# Altium PCB PCB1.PcbDoc
Units mil, origin at the board's own origin, x right, y up, seen from the top; angles counter-clockwise.
Board outline 6000 x 4000 mil, 2 copper layers (Top Layer, Bottom Layer); 32 components, 38 nets, 186 pads, 10 vias.
Unrouted connection lines stored in the file: 58.
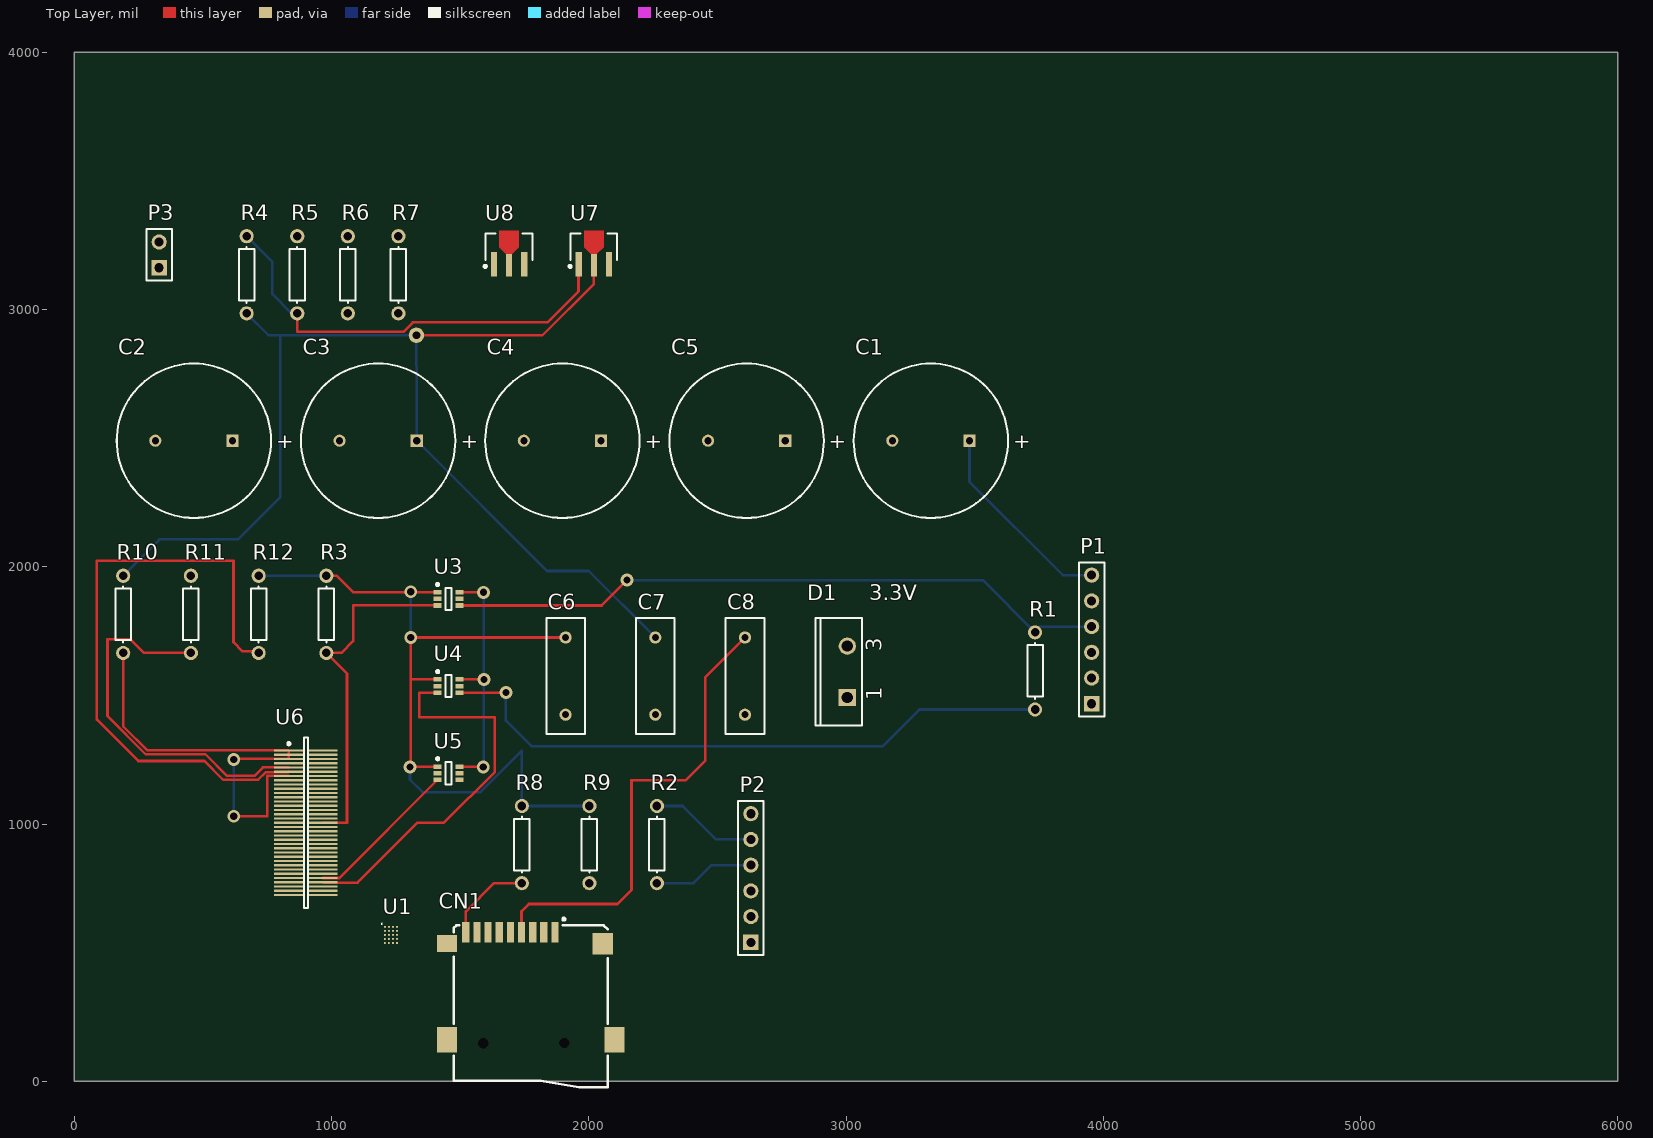
[diagram p0: Top Layer view]
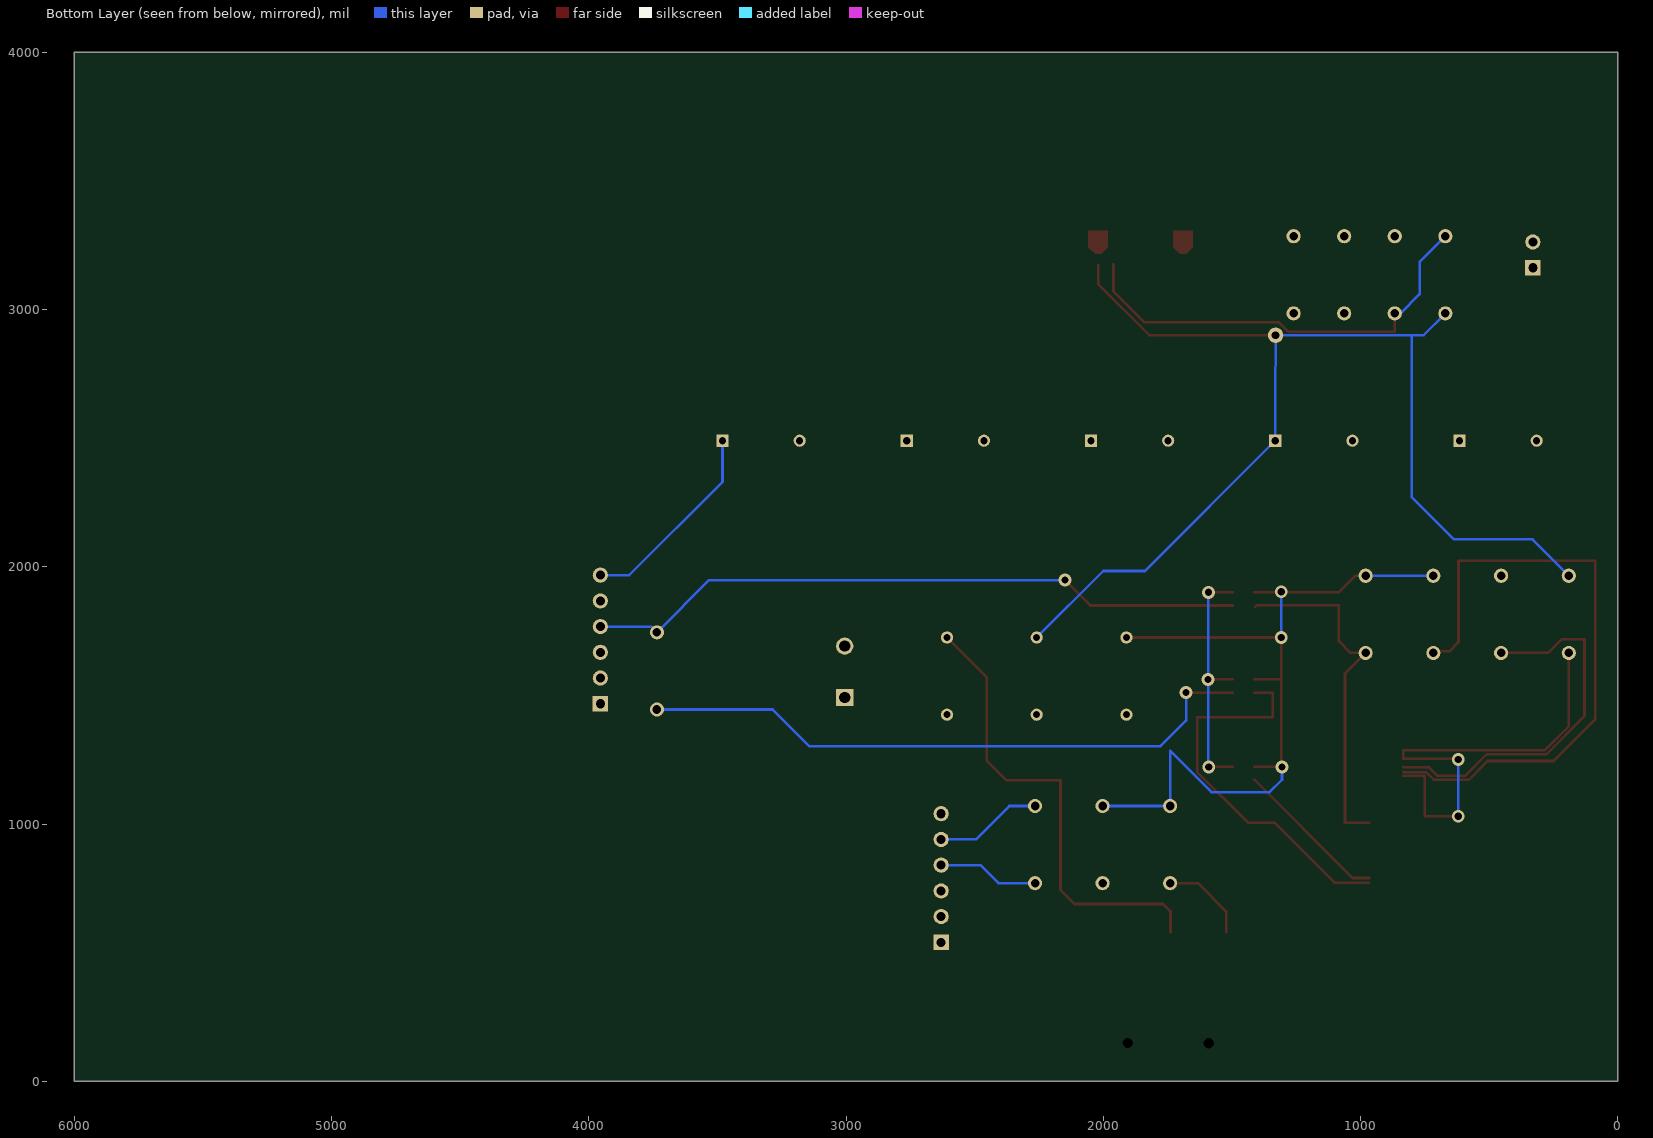
[diagram p1: Bottom Layer view, seen from below]

## Layer stack, top to bottom
Top Solder: solder mask 0.4, Solder Resist, Dk 3.5
Top Layer: signal copper 1.4
Dielectric 1: dielectric 12.6, FR-4, Dk 4.8
Bottom Layer: signal copper 1.4
Bottom Solder: solder mask 0.4, Solder Resist, Dk 3.5

## Board outline
0,0 6000,0 6000,4000 0,4000

## Design rules (kind name [scope] priority, off if disabled: settings)
Clearance Clearance_2 [InComponent('U7','U8')] p1: gap=0.1
Clearance Clearance_1 [All] p2: gap=5
Clearance [All] p3: gap=10
HoleToHoleClearance HoleToHoleClearance_5mil [All] p1: gap=5 allowstackedmicrovias=TRUE
HoleToHoleClearance [All] p2 off: gap=10 allowstackedmicrovias=TRUE
MinimumSolderMaskSliver [All] p1: minsoldermaskwidth=5
PolygonConnect [All] p1: connectstyle=Relief reliefconductorwidth=10 reliefentries=4 polygonreliefangle="90 Angle" airgapwidth=10
RoutingVias [All] p1: holewidth=28 width=50 viastyle="Through Hole" minholewidth=28 minwidth=50 maxholewidth=28 maxwidth=50
SolderMaskExpansion [All] p1: expansion=4
Width [All] p1: maxlimit=10 minlimit=10 preferedwidth=10
28 further rules are at their usual default settings.

## Components (designator, comment, footprint, x,y, rotation, side; value= is the part's Value field where it differs from the comment)
C1 "Cap Pol1" RB7.6-15 3330,2490 r0 top
C2 "Cap Pol1" RB7.6-15 465,2490 r0 top
C3 "Cap Pol1" RB7.6-15 1181.25,2490 r0 top
C4 "Cap Pol1" RB7.6-15 1897.5,2490 r0 top
C5 "Cap Pol1" RB7.6-15 2613.75,2490 r0 top
C6 "Cap" RAD-0.3 1910,1575 r90 top
C7 "Cap" RAD-0.3 2258.66,1575 r90 top
C8 "Cap" RAD-0.3 2607.32,1575 r90 top
CN1 "MicroSD Slot" "MICROSD Slot" 1615,585 r90 top
"D1     3.3V" "1N5257B" TO-220AC 3005,1591.34 r90 top
P1 "LiDAR" HDR1X6 3955,1467.38 r90 top
P2 "GPS" HDR1X6 2630,540 r90 top
P3 "8V Battery" HDR1X2 330,3162.62 r90 top
R1 "Res1" AXIAL-0.3 3735,1595 r90 top
R2 "Res1" AXIAL-0.3 2265,920 r270 top
R3 "Res1" AXIAL-0.3 980,1815 r90 top
R4 "Res1" AXIAL-0.3 670,3135 r90 top
R5 "Res1" AXIAL-0.3 866.67,3135 r90 top
R6 "Res1" AXIAL-0.3 1063.33,3135 r90 top
R7 "Res1" AXIAL-0.3 1260,3135 r90 top
R8 "Res1" AXIAL-0.3 1740,920 r90 top
R9 "Res1" AXIAL-0.3 2002.5,920 r90 top
R10 "Res1" AXIAL-0.3 190,1815 r270 top
R11 "Res1" AXIAL-0.3 453.33,1815 r90 top
R12 "Res1" AXIAL-0.3 716.67,1815 r90 top
U1 "SD Transceiver" TXS0206-29 1231,569 r0 top
U3 "Level Shifter" 74LVC1T45 1455,1875 r0 top
U4 "Level Shifter" 74LVC1T45 1455,1536.31 r0 top
U5 "Level Shifter" 74LVC1T45 1455,1197.62 r0 top
U6 "DF40(3)_70Pin" DF40(3)_70Pin 900,1005 r0 top
U7 "Power Regulator" LM317LCPK 2020,3217.15 r90 top
U8 "Power Regulator" LM317LCPK 1690,3217.15 r90 top

## Footprints (in the part's own frame and the unit in brackets; to place one, negate y for a bottom-side part, rotate by r counter-clockwise, add the part's x,y. Pads: shape width x height; smd on the part's side, far side on the other; paste and mask are expansions set on the pad)
74LVC1T45 [mm] "SOT65P210X110-6N, SOT23, 6-Leads, Body 2.00x2.10mm, Pitch 0.65mm, IPC Medium Density"
  rect 0.8x0.45 smd: 1(-1.075,0.65) 2(-1.075,0) 3(-1.075,-0.65) 4(1.075,-0.65) 5(1.075,0) 6(1.075,0.65)
  silkscreen extent -1.2,-1.1 0.3,1.55, body extent -0.67,-1.1 0.67,1.1, height 1.1
AXIAL-0.3 [mm] "Axial Device, Thru-Hole; 2 Leads; 0.3 in Pin Spacing"
  round 1.4 hole 0.85: 1(-3.81,0) 2(3.81,0)
  silkscreen extent -2.77,-0.76 2.77,0.76
DF40(3)_70Pin [mm] "SOJ42P450X305-70M,SOJ, 70-Leads, Body 16.80x4.53mm, Pitch 0.42mm, IPC Low Density"
  rect 2.91x0.22 smd: 1(1.675,7.14) 2(-1.675,7.14) 3(1.675,6.72) 4(-1.675,6.72) 5(1.675,6.3) 6(-1.675,6.3) 7(1.675,5.88) 8(-1.675,5.88) 9(1.675,5.46) 10(-1.675,5.46) 11(1.675,5.04) 12(-1.675,5.04) 13(1.675,4.62) 14(-1.675,4.62) 15(1.675,4.2) 16(-1.675,4.2) 17(1.675,3.78) 18(-1.675,3.78) 19(1.675,3.36) 20(-1.675,3.36) 21(1.675,2.94) 22(-1.675,2.94) 23(1.675,2.52) 24(-1.675,2.52) 25(1.675,2.1) 26(-1.675,2.1) 27(1.675,1.68) 28(-1.675,1.68) 29(1.675,1.26) 30(-1.675,1.26) 31(1.675,0.84) 32(-1.675,0.84) 33(1.675,0.42) 34(-1.675,0.42) 35(1.675,0) 36(-1.675,0) 37(1.675,-0.42) 38(-1.675,-0.42) 39(1.675,-0.84) 40(-1.675,-0.84) 41(1.675,-1.26) 42(-1.675,-1.26) 43(1.675,-1.68) 44(-1.675,-1.68) 45(1.675,-2.1) 46(-1.675,-2.1) 47(1.675,-2.52) 48(-1.675,-2.52) 49(1.675,-2.94) 50(-1.675,-2.94) 51(1.675,-3.36) 52(-1.675,-3.36) 53(1.675,-3.78) 54(-1.675,-3.78) 55(1.675,-4.2) 56(-1.675,-4.2) 57(1.675,-4.62) 58(-1.675,-4.62) 59(1.675,-5.04) 60(-1.675,-5.04) 61(1.675,-5.46) 62(-1.675,-5.46) 63(1.675,-5.88) 64(-1.675,-5.88) 65(1.675,-6.3) 66(-1.675,-6.3) 67(1.675,-6.72) 68(-1.675,-6.72) 69(1.675,-7.14) 70(-1.675,-7.14)
  silkscreen extent -1.8,-8.4 0.2,8.4, body extent -1.19,-8.4 1.19,8.4, height 3.05
HDR1X2 [mm] "Connector; Header; 2 Position"
  rect 1.5x1.5 hole 0.9: 1(0,0)
  round 1.5 hole 0.9: 2(2.54,0)
  silkscreen extent -1.27,-1.27 3.81,1.27
HDR1X6 [mm] "Connector; Header; 6 Position"
  rect 1.5x1.5 hole 0.9: 1(0,0)
  round 1.5 hole 0.9: 2(2.54,0) 3(5.08,0) 4(7.62,0) 5(10.16,0) 6(12.7,0)
  silkscreen extent -1.27,-1.27 13.97,1.27
LM317LCPK [mm] "SOT89-150P350X160-3N, SOT89, 3-Leads, Body 4.50x2.50mm, Pitch 1.50mm, Lead Span 3.5mm, IPC Medium Density"
  rect 2.4x0.6 smd: 1(-1.05,1.5) 3(-1.05,-1.5)
  rect 2.25x0.6 smd: 2(-1.15,0)
  Top Layer region: 0,0.3 0.65,0.95 1.6,0.95 2.159,0.95 2.286,0.95 2.286,0.762 2.286,0.508 2.286,0.067 2.286,-0.264 2.286,-0.95 1.6,-0.95 0.65,-0.95 0,-0.3 0,-0.025
  silkscreen extent -1.37,-2.3 2,2.47, body extent -0.6,-2.3 2,2.3, height 1.6
"MICROSD Slot" [mil] "MicroSD Card Socket"
  rect 80x28 smd: 1(-6,-253.47) 2(-6,-210.16) 3(-6,-166.85) 4(-6,-123.55) 5(-6,-80.24) 6(-6,-36.93) 7(-6,6.38) 8(-6,49.68) 9(-6,92.99)
  rect 98.43x78.74 smd: 10(-424.01,-485) 13(-424.01,166)
  rect 83x78.74 smd: 11(-50,-439.8)
  rect 67x78.74 smd: 12(-50,166)
  round 23.62 hole 40 unplated: MH1(-436.89,25) MH2(-436,-289.96)
  silkscreen extent -609,-459 50,140, body extent -611,-460 21,140, height 67
RAD-0.3 [mm] "Radial Cap, Thru-Hole; 2 Leads; 0.3 in Pin Spacing"
  round 1.2 hole 0.7: 1(-3.81,0) 2(3.81,0)
  silkscreen extent -5.71,-1.91 5.71,1.91
RB7.6-15 [mm] "Polarized Capacitor (Radial); 2 Leads"
  rect 1.2x1.2 hole 0.7: 1(3.81,0)
  round 1.2 hole 0.7: 2(-3.81,0)
  silkscreen extent -7.62,-7.62 7.62,7.62
TO-220AC [mm] "TO, Thru-Hole, Vertical, Heatsink Mounted; 3 In-Line Leads (1 Absent); Pitch 2.54 mm"
  rect 1.7x1.7 hole 1.1: 1(-2.54,0)
  round 1.7 hole 1.1: 3(2.54,0)
  silkscreen extent -5.3,-1.45 5.3,3.15
TXS0206-29 [mm] "BGA20C40P4X5_156X196X50, BGA, 20-Leads, Body 1.56x1.96mmx0.50mm, Pitch 0.40mm"
  round 0.2 smd: A1(-0.6,0.8) A2(-0.2,0.8) A3(0.2,0.8) A4(0.6,0.8) B1(-0.6,0.4) B2(-0.2,0.4) B3(0.2,0.4) B4(0.6,0.4) C1(-0.6,0) C2(-0.2,0) C3(0.2,0) C4(0.6,0) D1(-0.6,-0.4) D2(-0.2,-0.4) D3(0.2,-0.4) D4(0.6,-0.4) E1(-0.6,-0.8) E2(-0.2,-0.8) E3(0.2,-0.8) E4(0.6,-0.8)
  silkscreen extent -0.93,1.04 -0.83,1.13, body extent -0.78,-0.98 0.78,0.98, height 0.5

## Part data
C1 C2 C3 C4 C5: "Polarized Capacitor (Radial)"
C6 C7 C8: "Capacitor"
"D1     3.3V": library part "Diode 10TQ040", "Schottky Rectifier"
P1: library part "Header 6", "Header, 6-Pin, for LiDAR"
P2: library part "Header 6", "Header, 6-Pin, for GPS"
P3: library part "Header 2H", "Header, 2-Pin, Right Angle"
R1 R2 R3 R4 R5 R6 R7 R8 R9 R10 R11 R12: "Resistor"
U1: library part TXS0206-29
U3 U4 U5: library part Component_1, "74LVC1T45 Level Shifter"

## Free pads (board coordinates)
  round 60 hole 30: 4(1330,2900)

## Via types
v1: diameter 50, hole 28, Top Layer to Bottom Layer, 10 vias

## Nets (pads, with @x,y where several pads share a name; then routed paths per layer and width w, separated by ;. In a path a pad name is that pad's centre, name@x,y a point inside that pad or via, vN(x,y) a via of type N, cw(c..) or ccw(c..) an arc to the next point about the centre after c; other vN are vias at no path point)
GND: C6.1 C7.1 C8.1 CN1.6 CN1.10 CN1.11 CN1.12 CN1.13 P3.1 U1.C2 U1.C3 U3.2 U3.5 U4.2 U4.5 U5.2 U5.5 U6.1 U6.5 U6.9 U6.11 U6.13 U6.15
NetC1_1: C1.1 C5.1 P1.6 P2.5 R2.1 R6.1 U8.2 | length 1204.1
  Bottom Layer w10: R2.1 2365,1070 2495,940 P2.5 ; C1.1 3480,2330 3842.62,1967.38 P1.6
NetC2_1: C2.1 P3.2 U7.3 U8.3
NetC2_2: C2.2 C3.2 R5.2
NetC3_1: C3.1 C7.2 pad.4 R4.1 R10.1 U1.B2 U7.2 | length 4560.5
  Top Layer w10: pad.4 1820,2900 2020,3100 U7.2
  Bottom Layer w10: R10.1 331.25,2106.25 636.25,2106.25 800,2270 800,2900 ; R4.1 755,2900 800,2900 ; C7.2 2000,1983.66 1837.59,1983.66 C3.1 1331.25,2658.75 pad.4 800,2900
NetC4_2: C4.2 C5.2 R7.2
NetC6_2: C6.2 R3.2 R8.2 R9.2 R12.2 U1.A2 U3.1 U4.1 U5.1 | length 3267.1
  Top Layer w10: R3.2 1021,1965 1085.41,1900.59 U3.1 ; v1(1305,1222) v1@1306,1223 ; U5.1@1412.46,1223 v1@1306,1223 ; U4.1 1308,1561.9 ; C6.2 v1(1308,1725) 1308,1561.9 ; v1@1306,1223 1308,1225 1308,1561.9
  Bottom Layer w10: R12.2 R3.2 ; v1(1305,1222) 1305,1172 1353,1124 1579,1124 1740,1285 R8.2 R9.2 ; v1(1308,1725) v1(1308,1903)
NetC8_2: C8.2 CN1.4 U1.B3 | length 1830.4
  Top Layer w10: CN1.4 1738.55,660.55 1767,689 2111,689 2166,744 2166,1170 2376,1170 2453,1247 2453,1570.68 C8.2
NetCN1_1: CN1.1 U1.A4
NetCN1_2: CN1.2 U1.B4
NetCN1_3: CN1.3 U1.C4
NetCN1_5: CN1.5 U1.D3
NetCN1_7: CN1.7 U1.D4
NetCN1_8: CN1.8 U1.E4
NetCN1_9: CN1.9 R8.1 U1.A3 U6.60 | length 344.6
  Top Layer w10: CN1.9 1522.01,660.01 1632,770 R8.1
"NetD1     3.3V_1": "D1     3.3V.1" P2.4 R2.2 | length 394
  Bottom Layer w10: R2.2 2408,770 2478,840 P2.4
NetP1_2: P1.2 U6.43
NetP1_3: P1.3 U6.45
NetP1_4: P1.4 R1.2 U3.4 | length 2606
  Top Layer w10: U3.4 2050.41,1849.41 v1(2149,1948) v1@2159,1958
  Bottom Layer w10: v1(2149,1948) 3532,1948 R1.2 3757.38,1767.38 P1.4
NetP2_3: P2.3 U5.4
NetR1_1: R1.1 U4.4 | length 2459.9
  Top Layer w10: U4.4 v1(1678,1510.72) v1@1691.72,1510.72
  Bottom Layer w10: v1(1678,1510.72) 1678,1402 1777,1303 3143,1303 3285,1445 R1.1
NetR3_1: R3.1 U3.3 U6.35 | length 1377
  Top Layer w10: U6.35 1060,1005 1060,1585 R3.1 1038,1665 1084,1711 1084,1851 1402.27,1851 U3.3@1408.27,1845
NetR4_2: R4.2 R5.1 U7.1 | length 1730.2
  Top Layer w10: R5.1 866.67,2913.33 1279.69,2913.33 1316.36,2950 1840,2950 1960,3070 1960,3174.87 U7.1
  Bottom Layer w10: R4.2 770,3185 770,3060 845,2985 R5.1
NetR6_2: R6.2 R7.1 U8.1
NetR9_1: R9.1 U1.E3
NetR10_2: R10.2 U6.2 U6.4 U6.6 U6.14 | length 1856.6
  Top Layer w10: R10.2 190,1380 283.9,1286.1 U6.2 U6.4 U6.6 643.03,1253.03 625.76,1235.76 v1@620,1241.52 ; v1(620,1030) 750,1030 750,1186 750.89,1186.89 U6.14 ; v1@620,1230 v1@620,1241.52 ; v1(620,1250.76) v1@620,1241.52
  Bottom Layer w10: v1@620,1010 v1(620,1030) v1(620,1250.76)
NetR11_1: R11.1 U6.10 | length 1459.6
  Top Layer w10: R11.1 271,1665 218,1718 129,1718 129,1419.79 277.68,1271.1 509.9,1271.1 594,1187 700.08,1187 733.04,1219.96 U6.10
NetR12_1: R12.1 U6.12 | length 2435.2
  Top Layer w10: R12.1 710.67,1671 654.79,1671 619,1706.79 619,2023 88,2023 88,1406 249,1245 505.43,1245 578.43,1172 714.79,1172 744.68,1201.89 832.52,1201.89 U6.12
NetU1_A1: U1.A1 U6.64
NetU1_B1: U1.B1 U6.68
NetU1_C1: U1.C1 U6.62
NetU1_D1: U1.D1 U6.66
NetU1_D2: U1.D2 U6.58
NetU1_E1: U1.E1 U6.70
NetU1_E2: U1.E2 U6.44
NetU3_6: U3.6 U4.6 U5.6 | length 973.3
  Top Layer w10: U5.6 v1@1595.22,1223.22 ; U4.6 v1(1592.9,1561.9) ; U3.6 v1(1591,1900.59) v1@1598.59,1900.59
  Bottom Layer w10: v1@1591,1222 v1(1591,1900.59)
  other v1: 1590,1222
NetU4_3: U4.3 U6.63 | length 1518
  Top Layer w10: U6.63@967.45,772 1101,772 1334,1005 1437,1005 1635,1203 1635,1414.28 1341.72,1414.28 1341.72,1510.72 U4.3
NetU5_3: U5.3 U6.61 | length 605
  Top Layer w10: U6.61 1030.68,790.04 U5.3
pads on no net: "D1     3.3V.3" C1.2 C4.1 CN1.MH1 CN1.MH2 P1.1 P1.5 P2.1 P2.2 P2.6 R11.2 U6.3 U6.7 U6.8 U6.16 U6.17 U6.18 U6.19 U6.20 U6.21 U6.22 U6.23 U6.24 U6.25 U6.26 U6.27 U6.28 U6.29 U6.30 U6.31 U6.32 U6.33 U6.34 U6.36 U6.37 U6.38 U6.39 U6.40 U6.41 U6.42 U6.46 U6.47 U6.48 U6.49 U6.50 U6.51 U6.52 U6.53 U6.54 U6.55 U6.56 U6.57 U6.59 U6.65 U6.67 U6.69

## Silkscreen, mask and mechanical layers (free items; w line width, h text height)
Mechanical 1:
  rectangle: 3300,145 4481.1,1326.1
  rectangle: 1475,4.45 1908.07,595
  rectangle: 145,100 1129.25,1497.64

## Text inside footprints (layer, text, board x,y; h text height)
C1: Top Overlay "+" at 3650.15,2460.99 h59.06
C2: Top Overlay "+" at 785.15,2460.99 h59.06
C3: Top Overlay "+" at 1501.4,2460.99 h59.06
C4: Top Overlay "+" at 2217.65,2460.99 h59.06
C5: Top Overlay "+" at 2933.9,2460.99 h59.06
CN1: Mechanical 1 "PCB Edge" at 1990,9 h9.84
"D1     3.3V": Top Overlay "3" at 3139.84,1671.65 h59.06 r90; Top Overlay "1" at 3139.84,1481.5 h59.06 r90